# EAGLE board CT_schematic (EAGLE 7.6.0)

Size 100 x 80 mm. Coordinates in mm from the lower left corner, seen from the top.
Outline: 0,0 100,0 100,80 0,80 0,0
Copper layers (1*16): Top 0.035mm / dielectric 1.5mm / Bottom 0.035mm
Design rules "default": minimum track width 10mil, minimum drill 24mil, track to track 8mil, track to pad 8mil, pad to pad 8mil, via to via 8mil, smd to smd 8mil, copper to edge 40mil, drill to drill 8mil, minimum pad ring 10mil, minimum via ring 8mil, stop-mask expansion 4mil, vias tented up to drill 0mil, thermal gap 10mil

## Footprints (pad centres in the part's own frame; a part is rotated, then mirrored left to right if it is on the bottom)
C0603 = smd 0.8 x 0.8: 1 -0.762,0; 2 0.762,0
C0402 = smd 0.5 x 0.5: 1 -0.508,0; 2 0.508,0
C0805 = smd 1.2 x 1.3: 1 -1.016,0; 2 1.016,0
C1206 = smd 1.3 x 1.6: 1 -1.524,0; 2 1.524,0
L0603 = smd 0.8 x 0.8: 1 -0.762,0; 2 0.762,0
L1210 = smd 1.2 x 2.5: 1 -1.524,0; 2 1.524,0
DR1040 = smd 1.6 x 3.2: 1 -4.458,0; 2 4.458,0
R0603 = smd 0.8 x 0.8: 1 -0.762,0; 2 0.762,0
UFQFPN32 = smd 0.6 x 0.3: 1 -2.35,1.75; 2 -2.35,1.25; 3 -2.35,0.75; 4 -2.35,0.25; 5 -2.35,-0.25; 6 -2.35,-0.75; 7 -2.35,-1.25; 8 -2.35,-1.75; 17 2.35,-1.75; 18 2.35,-1.25; 19 2.35,-0.75; 20 2.35,-0.25; 21 2.35,0.25; 22 2.35,0.75; 23 2.35,1.25; 24 2.35,1.75 | smd 0.3 x 0.6: 9 -1.75,-2.35; 10 -1.25,-2.35; 11 -0.75,-2.35; 12 -0.25,-2.35; 13 0.25,-2.35; 14 0.75,-2.35; 15 1.25,-2.35; 16 1.75,-2.35; 25 1.75,2.35; 26 1.25,2.35; 27 0.75,2.35; 28 0.25,2.35; 29 -0.25,2.35; 30 -0.75,2.35; 31 -1.25,2.35; 32 -1.75,2.35 | smd 3.45 x 3.45: EPAD 0,0
SAMTEC_FTSH-105-01-L-DV-K = smd 0.762 x 2.794: 1 -2.54,-2.032; 2 -2.54,2.032; 3 -1.27,-2.032; 4 -1.27,2.032; 5 0,-2.032; 6 0,2.032; 7 1.27,-2.032; 8 1.27,2.032; 9 2.54,-2.032; 10 2.54,2.032
SSOP-16 = smd 1.981 x 0.356: 1 -2.464,2.223; 2 -2.464,1.587; 3 -2.464,0.953; 4 -2.464,0.318; 5 -2.464,-0.318; 6 -2.464,-0.953; 7 -2.464,-1.587; 8 -2.464,-2.223; 9 2.464,-2.223; 10 2.464,-1.587; 11 2.464,-0.953; 12 2.464,-0.318; 13 2.464,0.318; 14 2.464,0.953; 15 2.464,1.587; 16 2.464,2.223
HTSS-105-01-G-D = drill 1 pad 1.8 square: 1 0,0 | drill 1 pad 1.8: 2 0,2.54; 3 2.54,0; 4 2.54,2.54; 5 5.08,0; 6 5.08,2.54; 7 7.62,0; 8 7.62,2.54; 9 10.16,0; 10 10.16,2.54
FCI_10118193-0001LF = smd 0.4 x 1.35: 1 -1.3,2.675; 2 -0.65,2.675; 3 0,2.675; 4 0.65,2.675; 5 1.3,2.675 | smd 1.6 x 1.4: 6 -3.2,2.45; 7 3.2,2.45 | smd 1.9 x 1.9: 8 -1.2,0; 9 1.2,0 | hole 0.5: -3.3,0; 3.3,0
SOT143B = smd 1 x 0.7: 1 -0.75,-1 | smd 0.6 x 0.7: 2 0.95,-1; 3 0.95,1; 4 -0.95,1
ABLS-25.000MHZ-B2F-T = smd 5.6 x 2.8: 1 -3.81,0; 2 5.69,0
TSOT-23-5 = smd 1.3 x 0.62: 1 -1.31,0.95; 2 -1.31,0; 3 -1.31,-0.95; 4 1.31,-0.95; 5 1.31,0.95
DFN8_2X3MC = smd 0.813 x 0.305: 1 -1.398,0.75; 2 -1.398,0.25; 3 -1.398,-0.25; 4 -1.398,-0.75; 5 1.398,-0.75; 6 1.398,-0.25; 7 1.398,0.25; 8 1.398,0.75 | smd 1.753 x 1.549: 9 0,0
JST-2-SMD = smd 1 x 4.6: 1 -1,-3.7; 2 1,-3.7 | smd 1.6 x 3.4: NC1 -3.4,1.5; NC2 3.4,1.5
SON-6 = smd 0.55 x 0.3: 1 -0.355,0.5 | smd 0.52 x 0.3: 2 -0.37,0; 3 -0.37,-0.5; 4 0.37,-0.5; 5 0.37,0; 6 0.37,0.5
SW_4-1437565-2 = smd 1.4 x 2.1: 1 -2.23,4.55; 2 -2.23,-4.55; 3 2.23,4.55; 4 2.23,-4.55
LGM67K-G1J2-24-Z = smd 0.8 x 1.4: A -2,0; C 0,0
NC7SZ125M5X = smd 1.3 x 0.7: 1 -1.3,0.95; 2 -1.3,0; 3 -1.3,-0.95; 4 1.3,-0.95; 5 1.3,0.95
DUMMY_PACKAGE_125 = drill 0.3: 1 0,-1; 2 1.5,-1; 3 3,-1

## Placement (x,y rotation side)
C1  1e-07  [C0603]  -19.05,57.15 0 top  (outside the outline)
C2  1e-07  [C0603]  -22.86,57.15 0 top  (outside the outline)
C3  4.7e-06  [C0603]  -59.69,52.07 0 top  (outside the outline)
C4  1e-07  [C0603]  -26.67,57.15 0 top  (outside the outline)
C5  4.7e-06  [C0603]  -63.5,52.07 0 top  (outside the outline)
C6  1e-08  [C0603]  -30.48,57.15 0 top  (outside the outline)
C7  1e-08  [C0603]  -34.29,57.15 0 top  (outside the outline)
C8  1e-06  [C0603]  -38.1,57.15 0 top  (outside the outline)
C9  1e-11  [C0402]  -26.67,62.23 0 top  (outside the outline)
C10  1e-11  [C0402]  -30.48,62.23 0 top  (outside the outline)
C11  1e-07  [C0402]  -34.29,62.23 0 top  (outside the outline)
C12  1e-06  [C0603]  -41.91,57.15 0 top  (outside the outline)
C13  1e-06  [C0603]  -45.72,57.15 0 top  (outside the outline)
C14  2.2e-07  [C0603]  -15.24,57.15 0 top  (outside the outline)
C15  1e-06  [C0603]  -49.53,57.15 0 top  (outside the outline)
C16  1e-06  [C0603]  -53.34,57.15 0 top  (outside the outline)
C17  1e-05  [C0805]  -27.94,45.72 0 top  (outside the outline)
C18  1e-05  [C0805]  -33.02,45.72 0 top  (outside the outline)
C19  1e-07  [C0402]  -38.1,62.23 0 top  (outside the outline)
C20  1e-05  [C1206]  -55.88,38.1 0 top  (outside the outline)
C21  1e-05  [C1206]  -62.23,38.1 0 top  (outside the outline)
C22  1e-08  [C0402]  -41.91,62.23 0 top  (outside the outline)
C23  1e-08  [C0402]  -45.72,62.23 0 top  (outside the outline)
F1  240.0  [L0603]  -57.15,57.15 0 top  (outside the outline)
I1  1e-05  [L1210]  -49.53,38.1 0 top  (outside the outline)
I2  5.2e-06  [DR1040]  -19.05,20.32 0 top  (outside the outline)
R1  10000.0  [R0603]  -20.32,52.07 0 top  (outside the outline)
R2  1000.0  [R0603]  -60.96,57.15 0 top  (outside the outline)
R3  1270.0  [R0603]  -64.77,57.15 0 top  (outside the outline)
R4  4700.0  [R0603]  -15.24,62.23 0 top  (outside the outline)
R5  10000.0  [R0603]  -25.4,52.07 0 top  (outside the outline)
R6  10000.0  [R0603]  -30.48,52.07 0 top  (outside the outline)
R7  10000.0  [R0603]  -35.56,52.07 0 top  (outside the outline)
R8  5.0  [R0603]  -19.05,62.23 0 top  (outside the outline)
R9  100000.0  [R0603]  -58.42,45.72 0 top  (outside the outline)
R10  309473.68421053  [R0603]  -48.26,45.72 0 top  (outside the outline)
R11  1000000.0  [R0603]  -53.34,45.72 0 top  (outside the outline)
R12  10000.0  [R0603]  -40.64,52.07 0 top  (outside the outline)
R13  10000.0  [R0603]  -45.72,52.07 0 top  (outside the outline)
R14  18000.0  [R0603]  -50.8,52.07 0 top  (outside the outline)
R15  470000.0  [R0603]  -63.5,45.72 0 top  (outside the outline)
R16  120000.0  [R0603]  -15.24,52.07 0 top  (outside the outline)
R17  2000.0  [R0603]  -22.86,62.23 0 top  (outside the outline)
R18  10000.0  [R0603]  -55.88,52.07 0 top  (outside the outline)
U1  stm32f042k4u6  [UFQFPN32]  -22.86,30.48 0 top  (outside the outline)
U2  FTSH-105-01-L-DV-K  [SAMTEC_FTSH-105-01-L-DV-K]  -35.56,7.62 0 top  (outside the outline)
U3  LTC2804CGN-1#PBF  [SSOP-16]  -55.88,20.32 0 top  (outside the outline)
U4  HTSS-105-01-G-D  [HTSS-105-01-G-D]  -41.91,29.21 0 top  (outside the outline)
U5  10118193-0001LF  [FCI_10118193-0001LF]  -50.8,29.21 0 top  (outside the outline)
U6  prtr5v0u2ax  [SOT143B]  -58.42,62.23 0 top  (outside the outline)
U7  ABLS-25.000MHZ-B2F-T  [ABLS-25.000MHZ-B2F-T]  -26.67,39.37 0 top  (outside the outline)
U8  ltc3406es5  [TSOT-23-5]  -38.1,45.72 0 top  (outside the outline)
U9  MCP73831T-2ACI/MC  [DFN8_2X3MC]  -20.32,66.04 0 top  (outside the outline)
U10  S2B-PH-SM4-TB(LF)(SN)  [JST-2-SMD]  -34.29,21.59 0 top  (outside the outline)
U11  TPS3895ADRYR  [SON-6]  -13.97,66.04 0 top  (outside the outline)
U12  4-1437565-2  [SW_4-1437565-2]  -57.15,6.35 0 top  (outside the outline)
U13  Q65110A2395  [LGM67K-G1J2-24-Z]  -38.1,39.37 0 top  (outside the outline)
U14  nc7sz125m5x  [NC7SZ125M5X]  -15.24,45.72 0 top  (outside the outline)
U15  nc7sz125m5x  [NC7SZ125M5X]  -21.59,45.72 0 top  (outside the outline)
U16  Dummy  [DUMMY_PACKAGE_125]  -64.77,62.23 0 top  (outside the outline)

## Library data of the parts
C1-C23 F1 I1 I2 R1-R18 U1-U16 = circuit_tree

## Nets
CLK_CRYSTAL_U1_2: C9.1 U1.2 U7.1
CLK_CRYSTAL_U1_3: C10.1 U1.3 U7.2
GND: C1.2 C2.2 C3.2 C4.2 C5.2 C6.2 C7.2 C8.2 C9.2 C10.2 C11.2 C12.2 C13.2 C15.2 C16.2 C17.2 C18.1 C18.2 C19.2 C20.2 C21.2 C22.2 C23.2 R2.2 R8.2 R10.2 R14.2 R16.2 R17.2 U1.EPAD U2.3 U2.5 U3.8 U4.9 U5.5 U5.6 U5.7 U5.8 U5.9 U6.1 U8.2 U9.6 U9.9 U10.2 U11.2 U13.C U14.2 U14.3 U15.1 U15.3 U16.1
INPUT_USBPOWER_5V: C20.1 R18.2 U5.1 U6.4 U9.1 U9.2
NET_U1_4: R4.1 U1.4 U15.4
NET_U1_5: C6.1 C7.1 C8.1 F1.1 U1.5
NET_U1_31: R3.1 U1.31 U13.A
NET_U1_32: R1.1 U1.32 U12.3 U12.4
NET_U2_9: R8.1 U2.9
NET_U3_6: C12.1 U3.6
NET_U3_7: C14.1 I1.2 U3.7
NET_U3_9: C13.1 U3.9
NET_U3_10: C14.2 U3.10
NET_U3_11: R9.1 U3.11
NET_U4_3: U3.1 U4.3
NET_U4_4: U3.2 U4.4
NET_U4_5: U3.3 U4.5
NET_U4_6: U3.4 U4.6
NET_U8_1: U8.1
NET_U8_3: I2.1 U8.3
NET_U8_5: R10.1 R11.1 U8.5
NET_U8_ATNET_3: I2.2 R11.2
NET_U9_5: R18.1 U9.5
NET_U9_8: R17.1 U9.8
NET_U11_1: R13.1 R14.1 U11.1
NET_U11_3: R15.2 R16.1 U11.3
NET_U11_4: R12.1 U11.4 U14.4 U15.2
NET_U12_1: R2.1 U12.1 U12.2
PROC_PA4: U1.10 U16.2
PROC_PA5: U1.11 U16.3
PROC_SYS_SWCLK: R6.1 U1.24 U2.4
PROC_SYS_SWDIO: R7.1 U1.23 U2.2
PROC_USART2_CTS: U1.6 U3.13
PROC_USART2_RTS: U1.7 U3.15
PROC_USART2_RX: U1.9 U3.16
PROC_USART2_TX: U1.8 U3.14
PROC_USB_DM: U1.21 U5.2 U6.3
PROC_USB_DP: U1.22 U5.3 U6.2
RST_OUT_U2_JTAG_RST_B: R5.1 U2.10 U14.1
VCC_S1_3V7: C17.1 C21.1 U8.4 U9.3 U9.4 U10.1
VCC_TIER1_2V5: C1.1 C2.1 C3.1 C4.1 C5.1 C11.1 C15.1 C16.1 C18.2 C19.1 C22.1 C23.1 F1.2 I1.1 I2.2 R1.2 R3.2 R4.2 R5.2 R6.2 R7.2 R9.2 R11.2 R12.2 R13.2 R15.1 U1.1 U1.17 U2.1 U3.5 U3.12 U11.6 U14.5 U15.5

## Tracks (layer width: path | path; a pad name or v marks a point on that pad's centre or on a via)
CLK_CRYSTAL_U1_2  (2 unrouted)
CLK_CRYSTAL_U1_3  (2 unrouted)
GND  (50 unrouted)
INPUT_USBPOWER_5V  (5 unrouted)
NET_U1_4  (2 unrouted)
NET_U1_5  (4 unrouted)
NET_U1_31  (2 unrouted)
NET_U1_32  (3 unrouted)
NET_U2_9  (1 unrouted)
NET_U3_6  (1 unrouted)
NET_U3_7  (2 unrouted)
NET_U3_9  (1 unrouted)
NET_U3_10  (1 unrouted)
NET_U3_11  (1 unrouted)
NET_U4_3  (1 unrouted)
NET_U4_4  (1 unrouted)
NET_U4_5  (1 unrouted)
NET_U4_6  (1 unrouted)
NET_U8_3  (1 unrouted)
NET_U8_5  (2 unrouted)
NET_U8_ATNET_3  (1 unrouted)
NET_U9_5  (1 unrouted)
NET_U9_8  (1 unrouted)
NET_U11_1  (2 unrouted)
NET_U11_3  (2 unrouted)
NET_U11_4  (3 unrouted)
NET_U12_1  (2 unrouted)
PROC_PA4  (1 unrouted)
PROC_PA5  (1 unrouted)
PROC_SYS_SWCLK  (2 unrouted)
PROC_SYS_SWDIO  (2 unrouted)
PROC_USART2_CTS  (1 unrouted)
PROC_USART2_RTS  (1 unrouted)
PROC_USART2_RX  (1 unrouted)
PROC_USART2_TX  (1 unrouted)
PROC_USB_DM  (2 unrouted)
PROC_USB_DP  (2 unrouted)
RST_OUT_U2_JTAG_RST_B  (2 unrouted)
VCC_S1_3V7  (5 unrouted)
VCC_TIER1_2V5  (33 unrouted)